# EAGLE board automatic battery charger circuit (EAGLE 6.1)
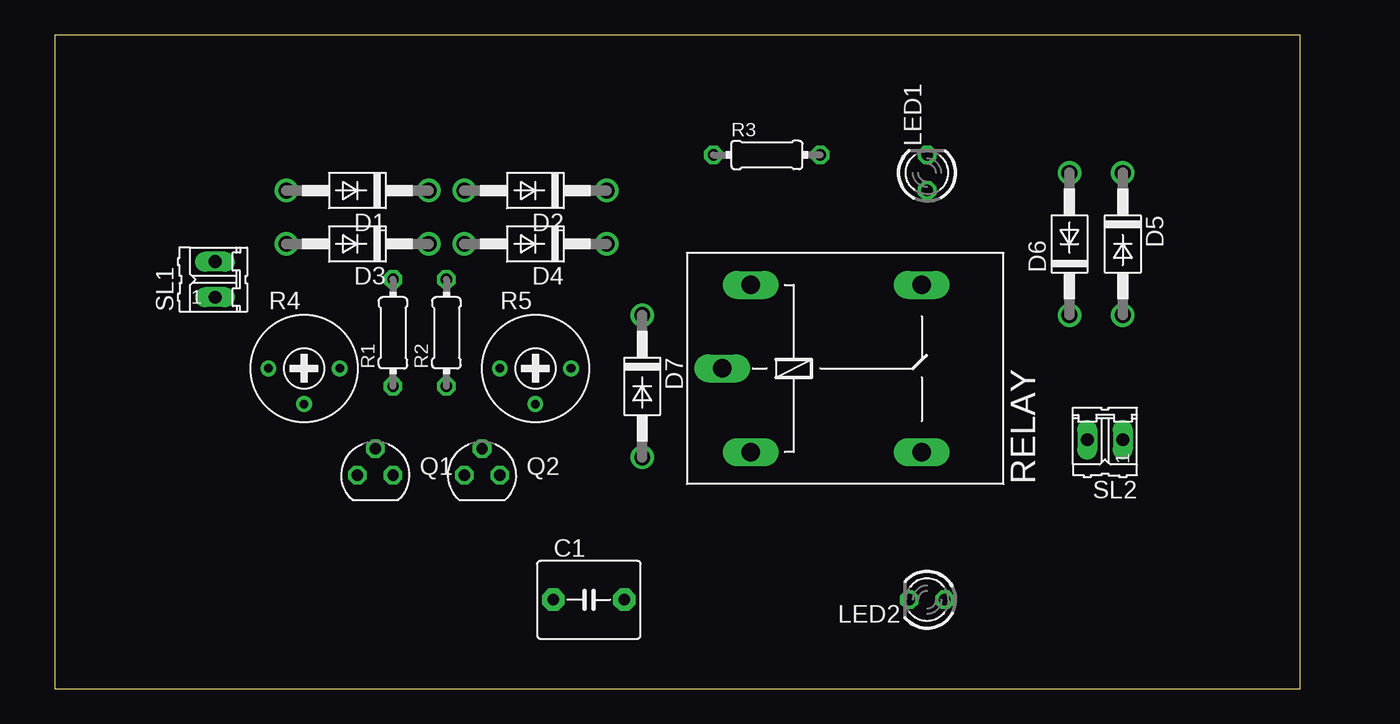
[diagram p0: board, top side]
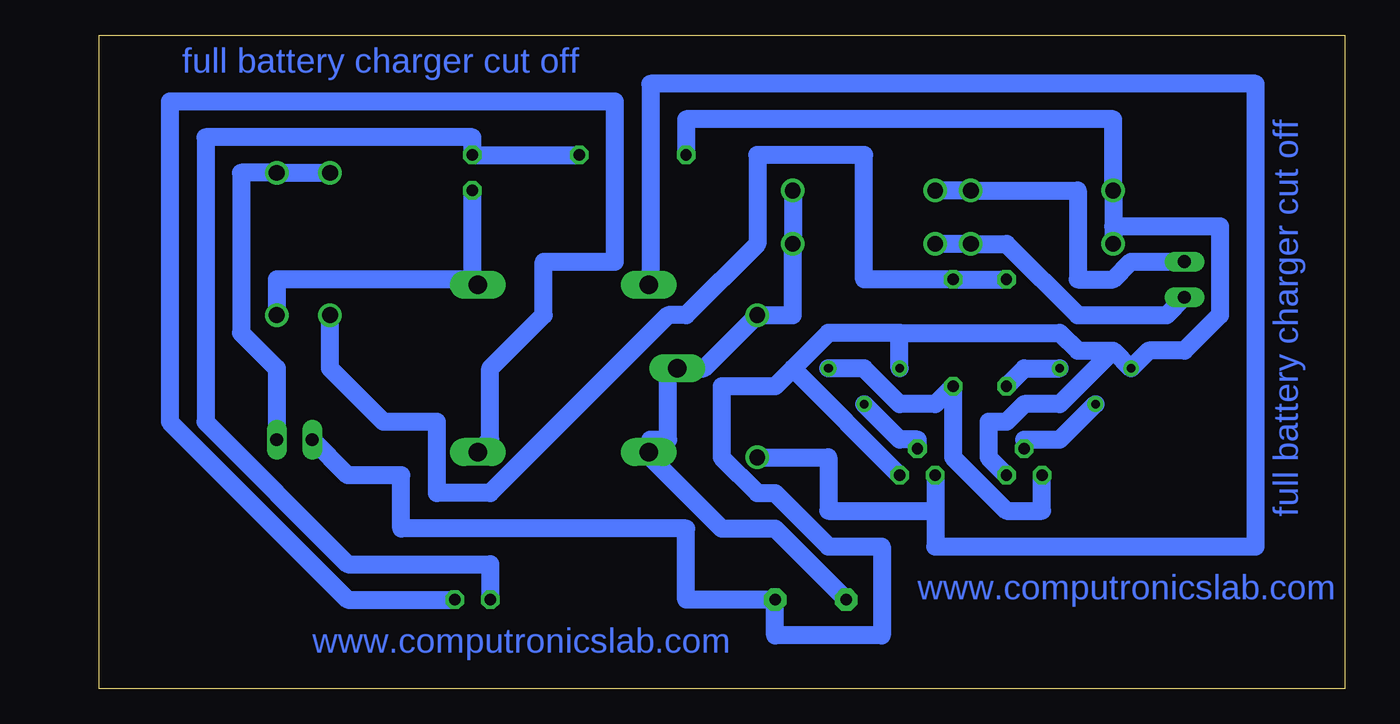
[diagram p1: board, bottom side, seen from below]

Size 88.88 x 46.66 mm. Coordinates in mm from the lower left corner, seen from the top.
Outline: 0,0 88.88,0 88.88,46.66 0,46.66 0,0
Copper layers (1*16): Top 0.035mm / dielectric 1.5mm / Bottom 0.035mm
Design rules: minimum track width 50mil, minimum drill 24mil, track to track 8mil, track to pad 8mil, pad to pad 8mil, via to via 8mil, smd to smd 8mil, copper to edge 40mil, drill to drill 8mil, minimum pad ring 10mil, minimum via ring 8mil, stop-mask expansion 4mil, vias tented up to drill 0mil, thermal gap 10mil

## Footprints (pad centres in the part's own frame; a part is rotated, then mirrored left to right if it is on the bottom)
C5B5.5 = drill 0.813 pad 1.6 octagon: 1 -2.54,0; 2 2.54,0
DO41-10 = drill 1.118: A 5.08,0; C -5.08,0
LED3MM = drill 0.813 octagon: A -1.27,0; K 1.27,0
SOT54A = drill 0.813 octagon: B 0,1.905; C -1.27,0; E 1.27,0
0204/7 = drill 0.813 octagon: 1 -3.81,0; 2 3.81,0
RTRIM3339P = drill 0.61: 1 -2.54,0; 2 0,-2.54; 3 2.54,0
G5LE = drill 1.321 long: 1 -7.493,-5.969; 2 -7.493,5.969; O 4.699,5.969; P -9.525,0; S 4.699,-5.969
02P = drill 0.914 long: 1 -1.27,0; 2 1.27,0

## Placement (x,y rotation side)
C1  2200uf  [C5B5.5]  38.1,6.35 0 top
D1  1N4007  [DO41-10]  21.59,35.56 180 top
D2  1N4007  [DO41-10]  34.29,35.56 180 top
D3  1N4007  [DO41-10]  21.59,31.75 180 top
D4  1N4007  [DO41-10]  34.29,31.75 180 top
D5  1N4007  [DO41-10]  76.2,31.75 270 top
D6  1N4007  [DO41-10]  72.39,31.75 90 top
D7  1N4007  [DO41-10]  41.91,21.59 270 top
LED1  3mm  [LED3MM]  62.23,36.83 90 top
LED2  3mm  [LED3MM]  62.23,6.35 180 top
Q1  BC547  [SOT54A]  22.86,15.24 0 top
Q2  BC547  [SOT54A]  30.48,15.24 0 top
R1  10K  [0204/7]  24.13,25.4 90 top
R2  10K  [0204/7]  27.94,25.4 90 top
R3  220R  [0204/7]  50.8,38.1 0 top
R4  10K  [RTRIM3339P]  17.78,22.86 0 top
R5  10K  [RTRIM3339P]  34.29,22.86 0 top
RELAY  6v  [G5LE]  57.15,22.86 0 top
SL1  transformer  [02P]  11.43,29.21 90 top
SL2  battery  [02P]  74.93,17.78 180 top

## Library data of the parts
C1 = capacitor-wima
D1-D7 = diode
LED1 LED2 = led
Q1 Q2 = transistor-small-signal
R1-R3 = resistor
R4 R5 = rcl
RELAY = relay; OC_FARNELL: unknown; OC_NEWARK: unknown
SL1 SL2 = con-amp-quick; OC_FARNELL: unknown; OC_NEWARK: unknown

## Nets
N$1: D1.C D2.A SL1.2
N$2: D3.C D4.A SL1.1
N$3: C1.2 D1.A D3.A Q1.E Q2.E R3.1 R4.1 R5.1 SL2.2
N$4: C1.1 D2.C D4.C D7.C RELAY.1 RELAY.P
N$6: Q1.B R4.2
N$7: R1.1 R4.3
N$8: Q1.C R2.1 R5.3
N$9: Q2.B R5.2
N$10: D6.C R1.2 R2.2
N$11: D5.A LED1.A RELAY.O
N$12: D7.A Q2.C RELAY.2
N$14: D5.C D6.A SL2.1
N$15: LED1.K LED2.K R3.2
N$16: LED2.A RELAY.S

## Tracks (layer width: path | path; a pad name or v marks a point on that pad's centre or on a via)
N$1
  Bottom 1.27: SL1.2 15.24,30.48 16.51,29.21 19.05,29.21 19.05,35.56 D1.C D2.A
N$2
  Bottom 1.27: SL1.1 12.7,26.67 19.05,26.67 24.13,31.75 D3.C D4.A
N$3
  Bottom 1.27: SL2.2 71.12,15.24 67.31,15.24 67.31,11.43 46.99,11.43 46.99,6.35 C1.2 40.64,3.81 33.02,3.81 33.02,10.16 36.83,10.16 40.64,13.97 41.91,13.97 44.45,16.51 44.45,21.59 40.64,21.59 39.37,22.86 | 16.51,24.13 R4.1 13.97,24.13 11.43,24.13 8.89,26.67 8.89,33.02 16.51,33.02 | 16.51,24.13 19.05,24.13 20.32,25.4 31.75,25.4 | R5.1 31.75,25.4 | Q1.E 25.4,16.51 25.4,19.05 24.13,19.05 22.86,20.32 20.32,20.32 16.51,24.13 | R3.1 46.99,40.64 16.51,40.64 D1.A 16.51,33.02 | 16.51,33.02 D3.A | 39.37,22.86 36.83,25.4 31.75,25.4 | 39.37,22.86 Q2.E
N$4
  Bottom 1.27: D2.C D4.C 39.37,26.67 D7.C 45.72,22.86 RELAY.P 48.26,22.86 48.26,17.78 49.53,17.78 RELAY.1 49.53,16.51 44.45,11.43 40.64,11.43 C1.1
N$6
  Bottom 1.27: R4.2 20.32,17.78 22.86,17.78 Q1.B
N$7
  Bottom 1.27: R4.3 22.86,22.86 R1.1
N$8
  Bottom 1.27: R5.3 34.29,22.86 31.75,20.32 29.21,20.32 R2.1 27.94,16.51 24.13,12.7 21.59,12.7 Q1.C
N$9
  Bottom 1.27: R5.2 31.75,17.78 30.48,17.78 Q2.B
N$10
  Bottom 1.27: R1.2 R2.2 34.29,29.21 34.29,38.1 41.91,38.1 41.91,31.75 46.99,26.67 48.26,26.67 60.96,13.97 64.77,13.97 64.77,19.05 68.58,19.05 72.39,22.86 D6.C
N$11
  Bottom 1.27: 62.23,29.21 LED1.A | D5.A 76.2,29.21 62.23,29.21 | 62.23,29.21 RELAY.O
N$12
  Bottom 1.27: 29.21,12.7 36.83,12.7 36.83,16.51 D7.A | Q2.C 29.21,12.7 | 29.21,12.7 29.21,10.16 6.35,10.16 6.35,43.18 49.53,43.18 49.53,29.21 RELAY.2
N$14
  Bottom 1.27: SL2.1 76.2,22.86 78.74,25.4 78.74,36.83 D5.C D6.A
N$15
  Bottom 1.27: LED2.K 60.96,8.89 71.12,8.89 81.28,19.05 81.28,39.37 62.23,39.37 LED1.K R3.2
N$16
  Bottom 1.27: LED2.A 71.12,6.35 83.82,19.05 83.82,41.91 52.07,41.91 52.07,30.48 57.15,30.48 57.15,26.67 60.96,22.86 60.96,17.78 RELAY.S

## Text on the board
Bottom: full battery charger cut off | full battery charger cut off | www.computronicslab.com | www.computronicslab.com